# EAGLE board RF AMP 1W (EAGLE 6.4)
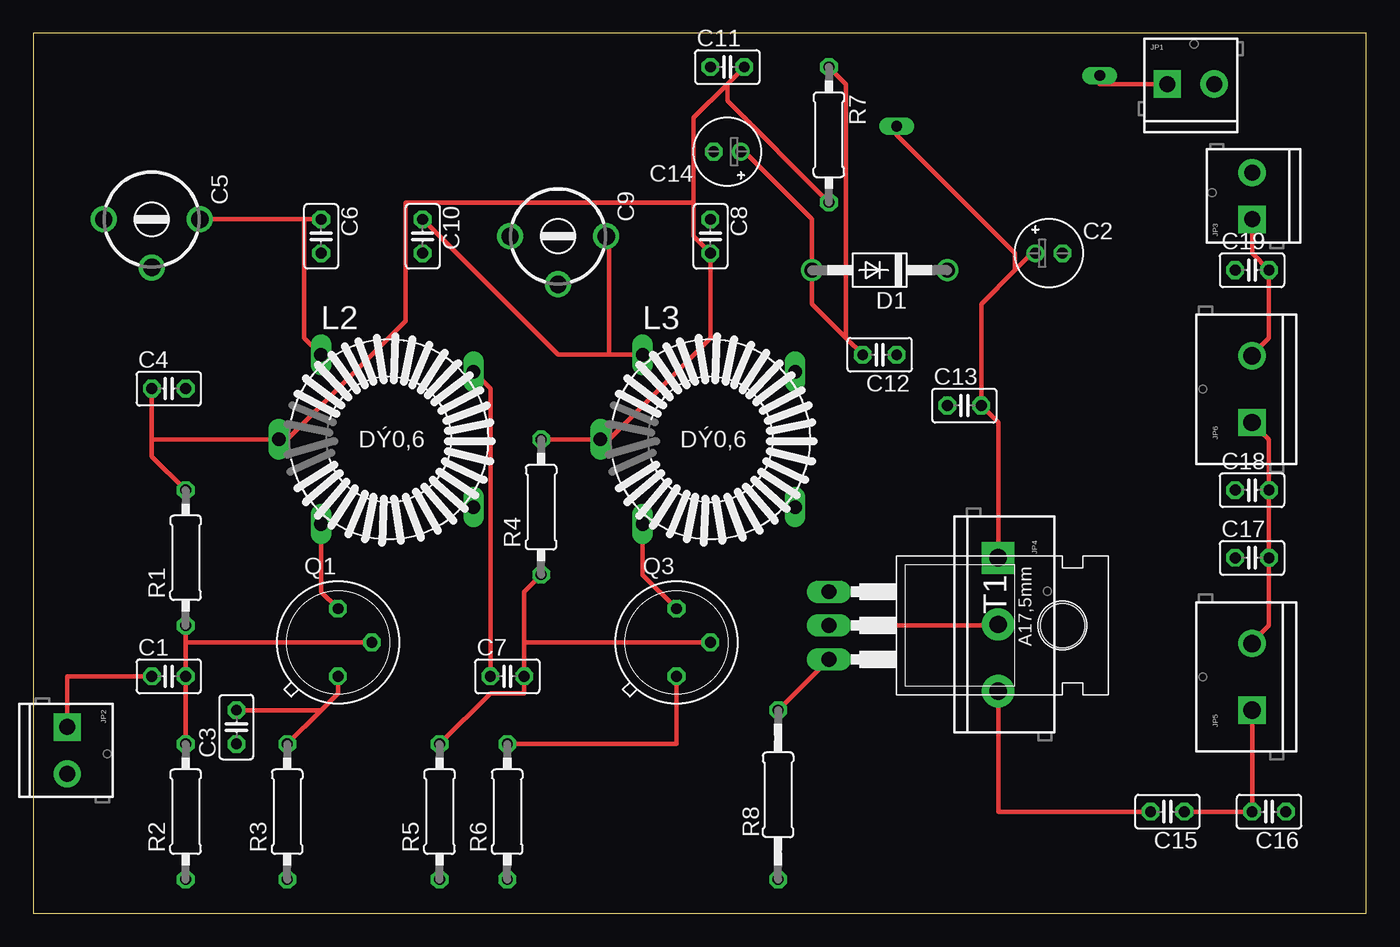
[diagram p0: board, top side]
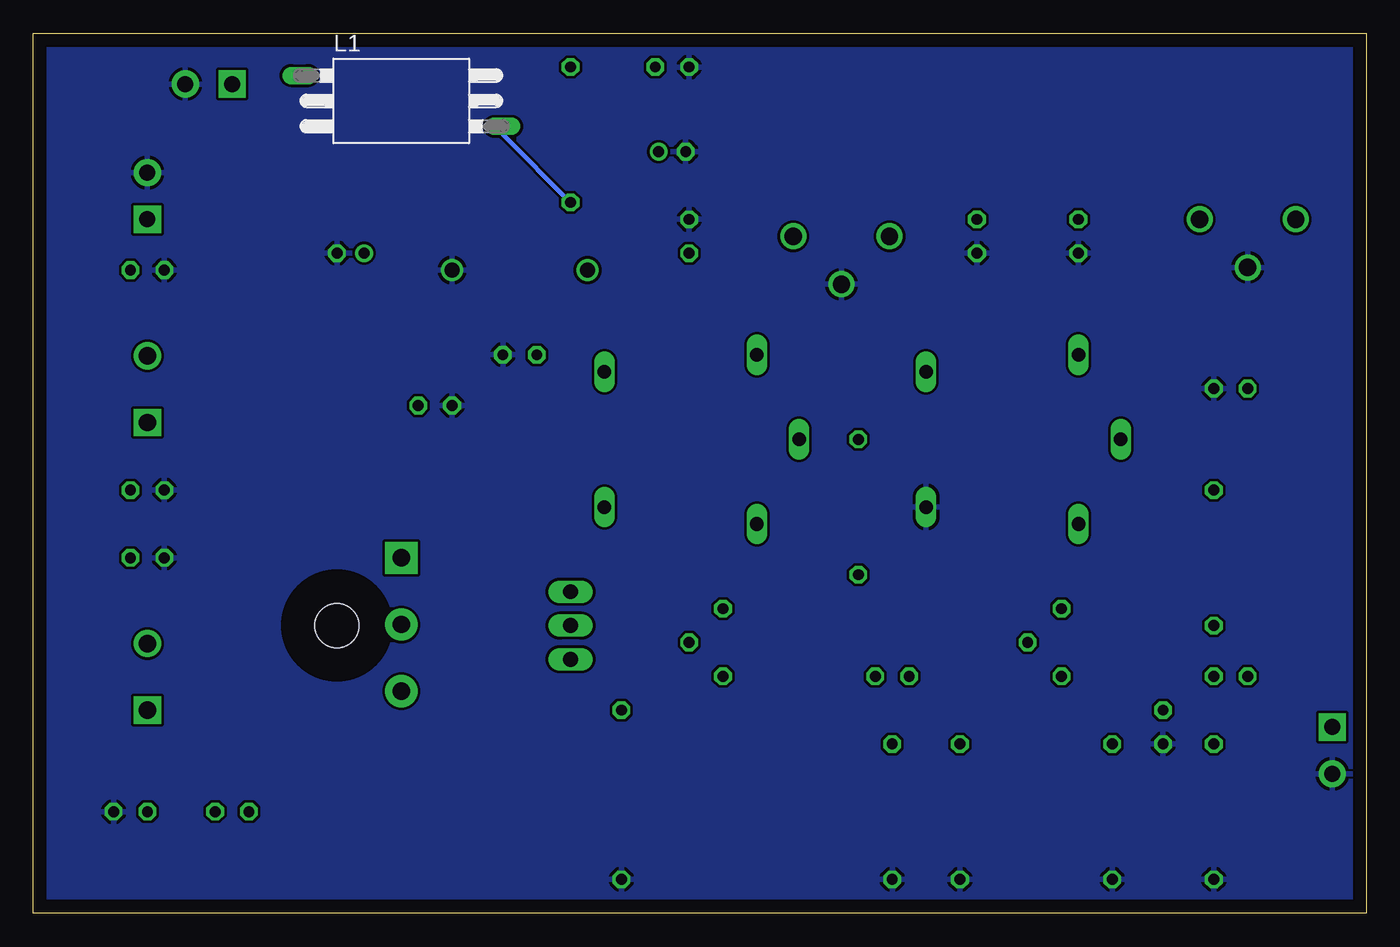
[diagram p1: board, bottom side, seen from below]

Size 100 x 66.03 mm. Coordinates in mm from the lower left corner, seen from the top.
Outline: 0,0 100,0 100,66.03 0,66.03 0,0
Copper layers (1*16): Top 0.035mm / dielectric 1.5mm / Bottom 0.035mm
Design rules "default *": minimum track width 14mil, minimum drill 24mil, track to track 8mil, track to pad 8mil, pad to pad 8mil, via to via 8mil, smd to smd 8mil, copper to edge 40mil, drill to drill 8mil, minimum pad ring 10mil, minimum via ring 8mil, stop-mask expansion 4mil, vias tented up to drill 0mil, thermal gap 10mil

## Footprints (pad centres in the part's own frame; a part is rotated, then mirrored left to right if it is on the bottom)
C025-025X050 = drill 0.813 octagon: 1 -1.27,0; 2 1.27,0
E2-5 = drill 0.813 pad 1.27: + -1.016,0 | drill 0.813 pad 1.27 octagon: - 1.016,0
CTRIM808-BC = drill 1.3: 1 -3.607,0; 2 0,3.607; 3 3.607,0
DO41-10 = drill 1.118: A 5.08,0; C -5.08,0
SCREWTERMINAL-3.5MM-2 = drill 1.2 pad 2.032 square: 1 0,0 | drill 1.2 pad 2.032: 2 3.5,0
SCREWTERMINAL-5MM-3 = drill 1.3 pad 2.413 square: 1 0,0 | drill 1.3 pad 2.413: 2 5,0; 3 10,0
SCREWTERMINAL-5MM-2 = drill 1.3 pad 2.032 square: 1 0,0 | drill 1.3 pad 2.032: 2 5,0
82114A = drill 0.813 long: 1 -7.62,1.905; 2 7.62,-1.905
ED16 = drill 1.016 long: A -8.255,0; B -5.08,-6.35; C -5.08,6.35; OUT1 6.35,5.08; OUT2 6.35,-5.08
TO39 = drill 0.813 octagon: 1 0,-2.54; 2 2.54,0; 3 0,2.54
0207/10 = drill 0.813 octagon: 1 -5.08,0; 2 5.08,0
0207/12 = drill 0.813 octagon: 1 -6.35,0; 2 6.35,0
TO220 = drill 1.118 long: 1 -2.54,-6.35; 2 0,-6.35; 3 2.54,-6.35 | hole 3.302: 0,11.176

## Placement (x,y rotation side)
C1  [C025-025X050]  10.16,17.78 0 top
C2  100uF  [E2-5]  76.2,49.53 0 top
C3  47nF  [C025-025X050]  15.24,13.97 90 top
C4  100nF  [C025-025X050]  10.16,39.37 0 top
C5  [CTRIM808-BC]  8.89,52.07 180 top
C6  100pF  [C025-025X050]  21.59,50.8 270 top
C7  47nF  [C025-025X050]  35.56,17.78 0 top
C8  100nF  [C025-025X050]  50.8,50.8 270 top
C9  [CTRIM808-BC]  39.37,50.8 180 top
C10  100pF  [C025-025X050]  29.21,50.8 270 top
C11  100nF  [C025-025X050]  52.07,63.5 0 top
C12  100nF  [C025-025X050]  63.5,41.91 180 top
C13  100nF  [C025-025X050]  69.85,38.1 0 top
C14  10uF  [E2-5]  52.07,57.15 180 top
C15  100nF  [C025-025X050]  85.09,7.62 180 top
C16  560pF  [C025-025X050]  92.71,7.62 180 top
C17  560pF  [C025-025X050]  91.44,26.67 0 top
C18  560pF  [C025-025X050]  91.44,31.75 0 top
C19  560pF  [C025-025X050]  91.44,48.26 0 top
D1  1N4004  [DO41-10]  63.5,48.26 180 top
JP1  [SCREWTERMINAL-3.5MM-2]  85.09,62.23 0 top
JP2  IN  [SCREWTERMINAL-3.5MM-2]  2.54,13.97 270 top
JP3  OUT  [SCREWTERMINAL-3.5MM-2]  91.44,52.07 90 top
JP4  [SCREWTERMINAL-5MM-3]  72.39,26.67 270 top
JP5  L7  [SCREWTERMINAL-5MM-2]  91.44,15.24 90 top
JP6  L8  [SCREWTERMINAL-5MM-2]  91.44,36.83 90 top
L1  JAF1 5uH VK200  [82114A]  72.39,60.96 0 bottom
L2  [ED16]  26.67,35.56 0 top
L3  [ED16]  50.8,35.56 0 top
Q1  BFY50  [TO39]  22.86,20.32 0 top
Q3  BFY50  [TO39]  48.26,20.32 0 top
R1  12K  [0207/10]  11.43,26.67 90 top
R2  1.5K  [0207/10]  11.43,7.62 90 top
R3  100  [0207/10]  19.05,7.62 90 top
R4  12K  [0207/10]  38.1,30.48 90 top
R5  1.5K  [0207/10]  30.48,7.62 90 top
R6  33  [0207/10]  35.56,7.62 90 top
R7  1k  [0207/10]  59.69,58.42 270 top
R8  [0207/12]  55.88,8.89 90 top
T1  BUX85  [TO220]  66.04,21.59 270 top

## Library data of the parts
C1-C19 R1-R8 = rcl
D1 = diode
JP1-JP6 = SparkFun-Connectors
L1-L3 = inductors
Q1 Q3 = transistor-npn
T1 = transistor

## Nets
GND: C2.- C3.1 C4.2 C5.2 C6.2 C8.1 C9.2 C10.2 C11.1 C12.1 C13.1 C14.- C16.1 C17.1 C18.1 C19.1 D1.C JP1.2 JP2.2 JP3.2 L2.OUT2 R2.1 R3.1 R5.1 R6.1 R8.1
N$1: JP1.1 L1.1
N$2: C2.+ C4.1 C8.2 C11.2 C13.2 JP4.1 L1.2 L2.A L3.A R1.2 R4.2 R7.2
N$3: C1.2 Q1.2 R1.1 R2.2
N$4: C1.1 JP2.1
N$5: C3.2 Q1.1 R3.2
N$6: L2.B Q1.3
N$7: C5.1 C6.1 L2.C
N$8: R8.2 T1.3
N$9: JP4.2 T1.2
N$11: C7.2 Q3.2 R4.1 R5.2
N$12: C15.2 JP4.3
N$13: C15.1 C16.2 JP5.1
N$14: Q3.1 R6.2
N$15: L3.B Q3.3
N$16: C9.1 C10.1 L3.C
N$18: C12.2 C14.+ D1.A R7.1
N$19: C7.1 L2.OUT1
N$20: C17.2 C18.2 JP5.2 JP6.1
N$21: C19.2 JP3.1 JP6.2

## Tracks (layer width: path | path; a pad name or v marks a point on that pad's centre or on a via)
GND
  pour Bottom: 0,66.04 100.33,66.04 100.33,0 0,0
N$1
  Top 0.356: JP1.1 80.01,62.23 L1.1
N$2
  Top 0.356: JP4.1 72.39,36.83 C13.2 71.12,45.72 73.66,48.26 | 73.66,48.26 74.93,49.53 C2.+ | 73.66,48.26 73.66,49.53 64.77,58.42 L1.2 | R1.2 8.89,34.29 8.89,35.56 | C4.1 8.89,35.56 | 8.89,35.56 L2.A 19.05,35.56 27.94,44.45 27.94,53.34 49.53,53.34 | R4.2 L3.A 43.18,35.56 50.8,43.18 C8.2 49.53,50.8 49.53,53.34 | 49.53,53.34 49.53,59.69 52.07,62.23 | C11.2 52.07,62.23 | R7.2 52.07,60.96 52.07,62.23
  Bottom 0.356: R7.2 64.77,58.42 L1.2
N$3
  Top 0.356: R2.2 C1.2 11.43,20.32 | 11.43,20.32 R1.1 | 11.43,20.32 Q1.2
N$4
  Top 0.356: C1.1 2.54,17.78 JP2.1
N$5
  Top 0.356: 21.59,15.24 22.86,16.51 Q1.1 | 21.59,15.24 R3.2 | 21.59,15.24 C3.2
N$6
  Top 0.356: Q1.3 21.59,24.13 L2.B
N$7
  Top 0.356: C5.1 20.32,52.07 | 20.32,52.07 C6.1 | L2.C 20.32,43.18 20.32,52.07
N$8
  Top 0.356: T1.3 R8.2
N$9
  Top 0.356: T1.2 72.39,21.59 JP4.2
N$11
  Top 0.356: R5.2 34.29,16.51 36.83,16.51 C7.2 36.83,20.32 | R4.1 36.83,24.13 36.83,20.32 | 36.83,20.32 Q3.2
N$12
  Top 0.356: C15.2 72.39,7.62 JP4.3
N$13
  Top 0.356: C15.1 C16.2 JP5.1
N$14
  Top 0.356: R6.2 48.26,12.7 Q3.1
N$15
  Top 0.356: Q3.3 45.72,25.4 L3.B
N$16
  Top 0.356: C10.1 39.37,41.91 43.18,41.91 | L3.C 43.18,41.91 | 43.18,41.91 43.18,50.8 C9.1
N$18
  Top 0.356: 60.96,43.18 58.42,45.72 D1.A 58.42,52.07 53.34,57.15 C14.+ | 60.96,43.18 C12.2 | R7.1 60.96,62.23 60.96,43.18
N$19
  Top 0.356: C7.1 34.29,39.37 L2.OUT1
N$20
  Top 0.356: JP5.2 91.44,20.32 92.71,21.59 C17.2 C18.2 92.71,35.56 JP6.1
N$21
  Top 0.356: JP3.1 91.44,49.53 C19.2 92.71,43.18 91.44,41.91 JP6.2